# EAGLE board tjunction (EAGLE 5.11)
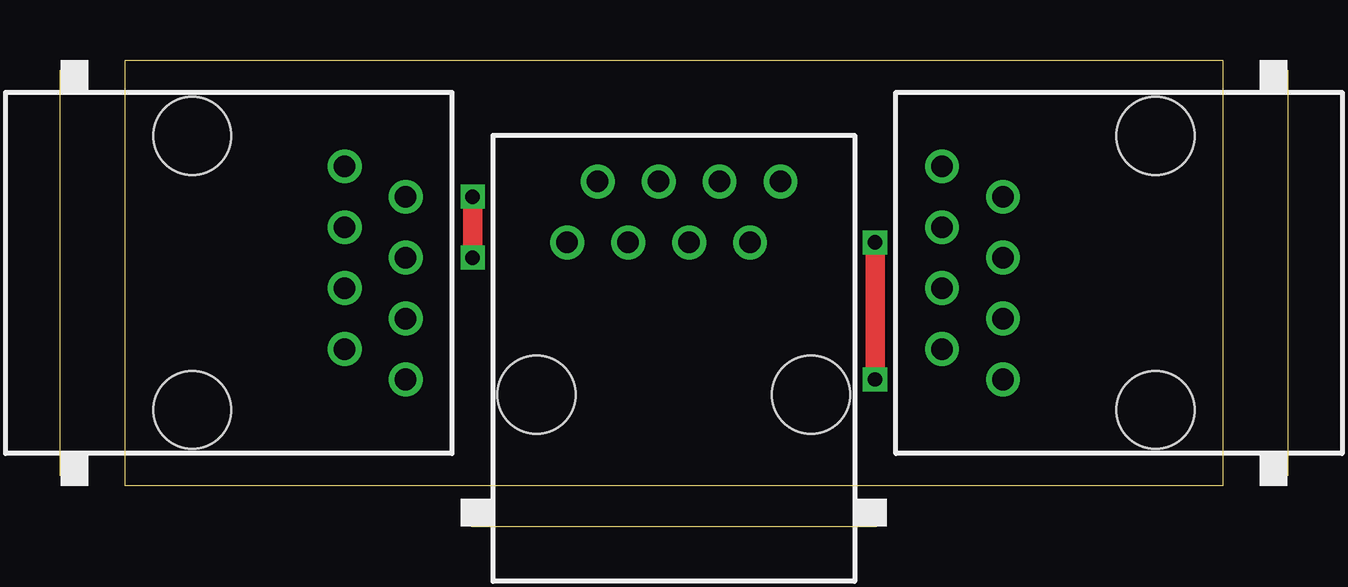
[diagram p0: board, top side]
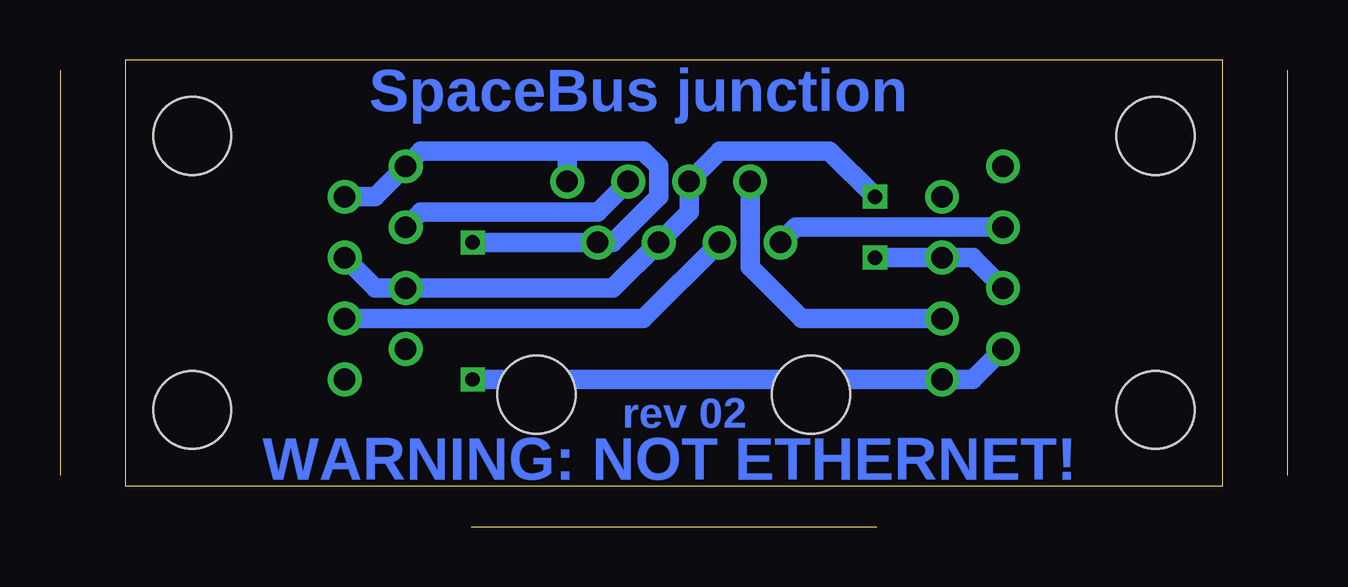
[diagram p1: board, bottom side, seen from below]

Size 45.72 x 17.77 mm. Coordinates in mm from the lower left corner, seen from the top.
Outline: 45.72,0 0,0 0,17.77 45.72,17.77 45.72,0
Copper layers (1*16): Top 0.035mm / dielectric 1.5mm / Bottom 0.035mm
Design rules "default *": minimum track width 20mil, minimum drill 24mil, track to track 20mil, track to pad 20mil, pad to pad 20mil, via to via 20mil, smd to smd 8mil, copper to edge 40mil, drill to drill 8mil, minimum pad ring 10mil, minimum via ring 8mil, stop-mask expansion 4mil, vias tented up to drill 0mil, thermal gap 10mil

## Footprints (pad centres in the part's own frame; a part is rotated, then mirrored left to right if it is on the bottom)
RJ45-NO-SHIELD = drill 0.9 pad 1.4 round: 1 -4.445,6.35; 2 -3.175,8.89; 3 -1.905,6.35; 4 -0.635,8.89; 5 0.635,6.35; 6 1.905,8.89; 7 3.175,6.35; 8 4.445,8.89 | hole 3.251: -5.715,0; 5.715,0

## Placement (x,y rotation side)
X1  RJ45-8L-S  [RJ45-NO-SHIELD]  2.79,8.89 270 top
X2  RJ45-8L-S  [RJ45-NO-SHIELD]  42.93,8.89 90 top
X3  RJ45-8L-S  [RJ45-NO-SHIELD]  22.86,3.81 0 top

## Library data of the parts
X1-X3 = con-tycoelectronics; MF: TYCO ELECTRONICS; MPN: RJ45-8L-S; OC_FARNELL: unknown; OC_NEWARK: 80K9067

## Nets
N$1: X1.3 X3.1
N$2: X1.6 X3.2
N$5: X1.7 X1.8 X2.7 X2.8 X3.7 X3.8
N$6: X2.3 X3.3
N$7: X2.6 X3.6
N$10: X1.4 X1.5 X2.4 X2.5 X3.4 X3.5

## Tracks (layer width: path | path; a pad name or v marks a point on that pad's centre or on a via)
N$1
  Bottom 0.813: X1.3 17.78,10.79 X3.1
N$2
  Bottom 0.813: X1.6 17.53,6.99 19.68,9.14 X3.2
N$5  (via drill 0.6)
  Top 0.813: v31.24,4.45 v31.24,10.16
  Bottom 0.813: X1.7 10.41,4.45 X1.8 v31.24,4.45 | v31.24,10.16 X3.7 25.4,10.16 23.5,12.06 23.5,13.34 24.13,13.97 27.05,13.97 27.3,13.97 | X2.7 35.31,12.06 X2.8 33.4,13.97 27.3,13.97 | 27.3,13.97 X3.8
N$6
  Bottom 0.813: X3.3 24.13,6.99 X2.3
N$7
  Bottom 0.813: X3.6 26.04,11.43 33.4,11.43 X2.6
N$10  (via drill 0.6)
  Top 0.813: v14.48,9.53 v14.48,12.06
  Bottom 0.813: X2.5 35.31,8.26 X2.4 25.4,8.26 X3.5 22.23,11.43 X3.4 20.95,13.97 16.38,13.97 v14.48,12.06 | v14.48,9.53 X1.4 10.41,9.53 X1.5

## Text on the board
Bottom: SpaceBus junction | rev 02 | WARNING: NOT ETHERNET!